# Altium PCB FLATSAT BCR.PcbDoc (part 3 of 3)
Units mm, origin at the board's own origin, x right, y up, seen from the top; angles counter-clockwise.
Board outline 180 x 90 mm, 4 copper layers (Top Layer, Internal Plane 1, Internal Plane 2, Bottom Layer); 220 components, 140 nets, 843 pads, 517 vias.
Unrouted connection lines stored in the file: 2.
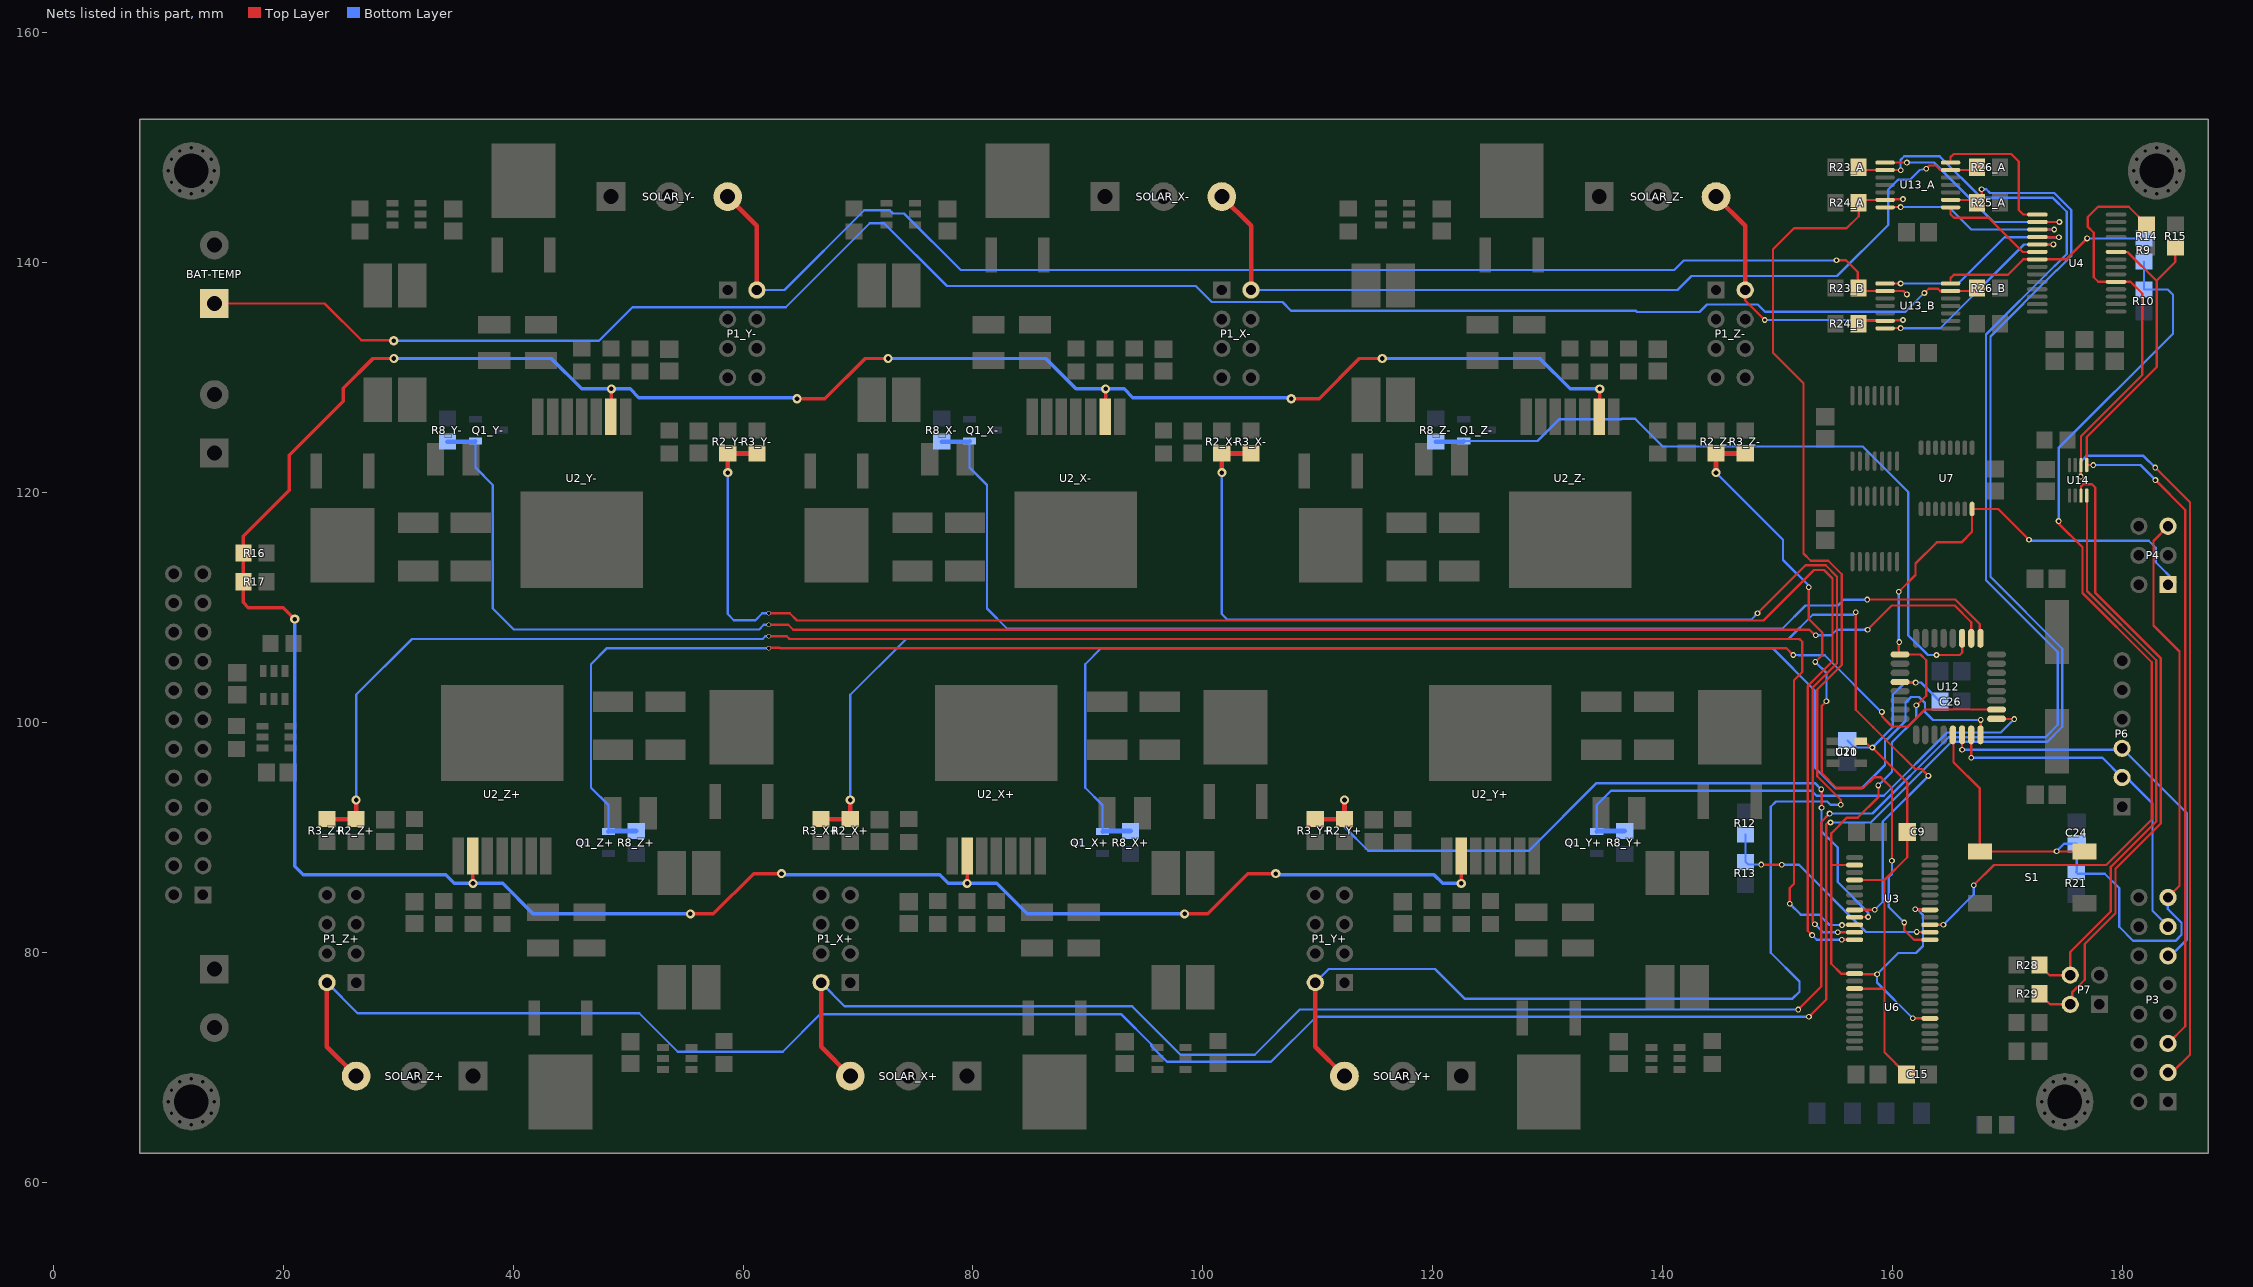
[diagram p5: the nets of this part, all layers, seen from the top]

## Via types
v1: diameter 0.5, hole 0.3, Top Layer to Bottom Layer, tented both sides, 205 vias
v2: diameter 0.5, hole 0.3, Top Layer to Bottom Layer, tented bottom, 114 vias
v3: diameter 0.8, hole 0.4, Top Layer to Bottom Layer, tented both sides, 103 vias
v4: diameter 1, hole 0.5, Top Layer to Bottom Layer, tented both sides, 77 vias
v5: diameter 0.4, hole 0.3, Top Layer to Bottom Layer, tented both sides, 18 vias

## Nets (pads, with @x,y where several pads share a name; then routed paths per layer and width w, separated by ;. In a path a pad name is that pad's centre, name@x,y a point inside that pad or via, vN(x,y) a via of type N, cw(c..) or ccw(c..) an arc to the next point about the centre after c; other vN are vias at no path point) (continued)
R\E\S\E\T\: C24.2 P3.15 P4.5 R21.2 S1.2 U12.29 | length 76.8
  Top Layer w0.2: U12.29@165.275,98.925 165.325,98.875 165.325,96.55 167.625,94.25 S1.2@167.625,88.775 S1.2@176.725,88.775 ; P4.5@184,117.08 182.725,115.805 182.725,108.453 185,106.178 185,85.8 184.125,84.925 P3.15@184.125,84.68 ; P4.5@184.122,116.777 P4.5@184.398,116.777
  Bottom Layer w0.2: v1(174.3,88.8) 174.95,89.45 C24.2@176.05,89.45 176.05,87.05 R21.2@176,87 176.15,86.85 178.5,86.85 179.75,85.6 179.75,82.225 180.975,81 184.65,81 185.175,81.525 185.175,82.575 183.975,83.775 183.975,84.53 P3.15@184.125,84.68
RXD: P3.11 P6.3 U12.30 | length 36.8
  Top Layer w0.2: v1(166.075,97.625) U12.30@166.075,99.35
  Bottom Layer w0.2: v1(166.075,97.625) 179.87,97.625 P6.3@180,97.755 185.65,92.105 185.65,81.125 P3.11@184.125,79.6
SCK: P4.1 U3.5 U3.14 U6.5 U6.14 U7.8 U12.17 | length 93.2
  Top Layer w0.2: 154.7,87.6 U3.14@156.725,87.6 ; U6.14@156.725,78.1 v1(158.675,78.1) ; U6.14@156.725,78.15 155.55,78.15 154.7,79 154.7,90.353 156.072,91.725 157,91.725 158.8,93.525 v1@158.8,94.55 ; v1@160.575,107.1 160.575,106.025 U12.17@160.675,105.925 162.45,105.925 162.95,105.425 162.95,102.325 162.125,101.5 v1(162.1,101.5) ; v1(160.575,111.375) 162.025,112.825 162.025,113.825 163.875,115.675 166.025,115.675 166.947,116.597 U7.8@166.947,118.583 169.217,118.583 v1(171.9,115.9) ; v1(161.775,74.275) U6.5@163,74.275 ; v1(162,83.75) U3.5@163.225,83.75
  Bottom Layer w0.2: v1(158.775,94.525) 159.975,95.725 159.975,98.275 162.1,100.4 v1(162.1,101.5) ; v1(160.575,111.375) 160.575,107.025 v1(160.6,107) ; v1(161.775,74.275) 158.675,77.375 v1(158.675,78.1) 160.525,79.95 162.075,79.95 162.675,80.55 162.675,83.253 162.178,83.75 v1(162,83.75) ; v1(171.9,115.9) 171.985,115.815 182.31,115.815 182.925,115.2 182.925,113.95 P4.1@184.65,112.225
SHDNX+: Q1_X+.1 R8_X+.1 U12.32 | length 113.6
  Top Layer w0.2: U12.32@167.7,98.5 v1(167.7,100.225)
  Bottom Layer w0.2: Q1_X+.1@91.287,90.509 91.287,92.813 89.775,94.325 89.775,105.075 91.175,106.475 149.575,106.475 153.3,102.75 153.3,96.05 155.1,94.25 157.325,94.25 159.375,96.3 159.375,98.359 161.15,100.134 161.15,101.75 161.625,102.225 162.325,102.225 162.85,101.7 162.85,100.925 163.55,100.225 v1(167.7,100.225)
  Bottom Layer w0.4: Q1_X+.1@91.287,90.509 91.337,90.559 R8_X+.1@93.718,90.559
SHDNX-: Q1_X-.1 R8_X-.1 U12.9 | length 108
  Top Layer w0.2: v1(157.825,110.7) 165.475,110.7 167.625,108.55 167.625,107.375 U12.9@167.675,107.325
  Bottom Layer w0.2: Q1_X-.1@79.713,124.491 79.713,122.187 81.225,120.675 81.225,109.925 83,108.15 150.425,108.15 152.45,110.175 155.275,110.175 155.783,110.683 157.808,110.683 v1(157.825,110.7)
  Bottom Layer w0.4: R8_X-.1@77.282,124.441 79.663,124.441 Q1_X-.1@79.713,124.491
SHDNY+: Q1_Y+.1 R8_Y+.1 U12.1 | length 45.9
  Top Layer w0.2: U12.1@169.275,100.3 v1(170.625,100.3)
  Bottom Layer w0.2: Q1_Y+.1@134.287,90.509 134.287,92.813 135.549,94.075 152.95,94.075 153.4,93.625 159.259,93.625 164.759,99.125 169.45,99.125 v1(170.625,100.3)
  Bottom Layer w0.4: Q1_Y+.1@134.287,90.509 134.337,90.559 R8_Y+.1@136.718,90.559
SHDNY-: Q1_Y-.1 R8_Y-.1 U12.10 | length 150.6
  Top Layer w0.2: v5(62.25,108.5) 63.944,108.5 64.369,108.075 152.8,108.075 v1@153.3,107.575 ; v1(157.85,108.075) 159.95,110.175 165.434,110.175 166.875,108.734 U12.10@166.875,107.325
  Bottom Layer w0.2: Q1_Y-.1@36.713,124.491 36.713,122.187 38.225,120.675 38.225,109.925 40.05,108.1 61.406,108.1 61.806,108.5 v5(62.25,108.5) ; v1(153.35,107.6) 154.7,107.6 155.175,108.075 v1(157.85,108.075)
  Bottom Layer w0.4: R8_Y-.1@34.282,124.441 36.663,124.441 Q1_Y-.1@36.713,124.491
SHDNZ+: Q1_Z+.1 R8_Z+.1 U12.2 | length 144.2
  Top Layer w0.2: v5(62.225,106.475) 62.25,106.5 63.207,106.5 63.232,106.475 66.5,106.475 150.775,106.475 v1(151.375,105.875) ; v1(159.1,100.925) 159.1,100.541 159.55,100.091 159.55,100.087 159.887,99.75 159.891,99.75 159.991,99.65 161.375,99.65 162.85,101.125 U12.2@169.075,101.125
  Bottom Layer w0.2: Q1_Z+.1@48.287,90.509 48.287,92.813 46.775,94.325 46.775,105.075 48.175,106.475 v5(62.225,106.475) ; v1(151.375,105.875) 151.825,105.875 151.85,105.85 154.125,105.85 v1@159.075,100.9
  Bottom Layer w0.4: Q1_Z+.1@48.287,90.509 48.337,90.559 R8_Z+.1@50.718,90.559
SHDNZ-: Q1_Z-.1 R8_Z-.1 U12.11 | length 63.9
  Top Layer w0.2: v1(163.85,105.875) 165.875,105.875 166.1,106.1 U12.11@166.1,107.45
  Bottom Layer w0.2: Q1_Z-.1@122.713,124.491 129.141,124.491 131.05,126.4 136.425,126.4 136.45,126.425 137.625,126.425 140.025,124.025 157.425,124.025 161.4,120.05 161.4,107.575 163.1,105.875 v1(163.85,105.875)
  Bottom Layer w0.4: R8_Z-.1@120.282,124.441 122.663,124.441 Q1_Z-.1@122.713,124.491
THERMO_BAT: BAT-TEMP.1 R26_B.2 U13_B.13 | length 163.7
  Top Layer w0.2: BAT-TEMP.1@14,136.46 23.59,136.46 26.775,133.275 29.55,133.275 v3(29.6,133.225) ; v1(162.8,137.375) 163.175,137.75 163.978,137.75 164.189,137.539 165.064,137.539 U13_B.13@165.075,137.55 R26_B.2@167.125,137.55
  Top Layer w0.5: R26_B.2@167.125,137.55 R26_B.2@167.375,137.8
  Bottom Layer w0.2: v3(29.6,133.225) 47.475,133.225 50.393,136.143 63.718,136.143 71.025,143.45 72.275,143.45 77.75,137.975 99.4,137.975 100.792,136.583 106.942,136.583 107.708,135.817 137.708,135.817 137.8,135.725 143.225,135.725 143.875,136.375 148.3,136.375 148.925,135.75 161.15,135.75 v1@162.788,137.388
THERMO_X+: P1_X+.2 R23_A.2 SOLAR_X+.3 U13_A.2 | length 210.9
  Top Layer w0.2: v1(151.825,75.025) 153.825,77.025 153.825,91.35 v1(154.55,92.075) ; R23_A.2@157.325,148.075 U13_A.2@159.375,148.075 ; U13_A.2@159.6,148.075 v1@160.75,148.075
  Top Layer w0.4: P1_X+.2@66.794,77.367 66.794,71.779 SOLAR_X+.3@69.334,69.239
  Top Layer w0.5: R23_A.2@157.075,148.325 R23_A.2@157.325,148.075
  Bottom Layer w0.2: P1_X+.2@66.794,77.367 68.861,75.3 93.875,75.3 98.075,71.1 104.525,71.1 108.45,75.025 v1(151.825,75.025) ; v1(154.55,92.075) 158.275,92.075 164.925,98.725 173.325,98.725 174.4,99.8 174.4,106.125 168.15,112.375 168.15,133.766 174.134,139.75 174.159,139.75 175.175,140.766 175.175,144.434 173.934,145.675 167.722,145.675 164.122,149.275 161.047,149.275 160.725,148.953 160.725,148.075 v1(160.75,148.05)
THERMO_X-: P1_X-.2 R26_A.2 SOLAR_X-.3 U13_A.13 | length 78.9
  Top Layer w0.2: v1(162.95,148.175) 163.25,148.475 163.778,148.475 164.178,148.075 U13_A.13@165.075,148.075 R26_A.2@167.125,148.075
  Top Layer w0.4: SOLAR_X-.3@101.666,145.761 104.206,143.221 P1_X-.2@104.206,137.633
  Top Layer w0.5: R26_A.2@167.125,148.075 R26_A.2@167.375,148.325
  Bottom Layer w0.2: P1_X-.2@104.206,137.633 141.308,137.633 142.525,138.85 155.2,138.85 159.65,143.3 159.65,146.375 160.5,147.225 161.55,147.225 162.4,148.075 v1(162.95,148.175)
THERMO_Y+: P1_Y+.2 R24_A.2 SOLAR_Y+.3 U13_A.6 | length 144
  Top Layer w0.2: v1(155.525,92.85) 155.525,93.275 153.475,95.325 153.475,102.875 155.6,105 155.6,112.9 154.425,114.075 152.9,114.075 152.275,114.7 152.275,129.525 149.625,132.175 149.625,141.175 151.45,143 156.025,143 157.075,144.05 R24_A.2@157.075,145.225 ; R24_A.2@157.325,145.475 U13_A.6@159.375,145.475 ; U13_A.6@159.5,145.525 160.85,145.525 160.875,145.55 161.049,145.55 v1(160.935,145.55)
  Top Layer w0.4: P1_Y+.2@109.794,77.367 109.794,71.779 SOLAR_Y+.3@112.334,69.239
  Top Layer w0.5: R24_A.2@157.075,145.225 R24_A.2@157.325,145.475
  Bottom Layer w0.2: P1_Y+.2@109.794,77.367 110.975,78.548 120.202,78.548 122.775,75.975 151.325,75.975 151.925,76.575 151.925,77.475 149.425,79.975 149.425,92.675 149.875,93.125 154.35,93.125 154.625,92.85 v1(155.525,92.85)
THERMO_Y-: P1_Y-.2 R23_B.2 SOLAR_Y-.3 U13_B.2 | length 116.4
  Top Layer w0.2: v1(155.15,140.225) 155.975,140.225 157,139.2 157,137.875 R23_B.2@157.075,137.8 ; R23_B.2@157.325,137.55 U13_B.2@159.375,137.55 ; U13_B.2@159.6,137.55 160.975,137.55 v1(161.275,137.25)
  Top Layer w0.4: SOLAR_Y-.3@58.666,145.761 61.206,143.221 P1_Y-.2@61.206,137.633
  Top Layer w0.5: R23_B.2@157.075,137.8 R23_B.2@157.325,137.55
  Bottom Layer w0.2: P1_Y-.2@61.206,137.633 63.608,137.633 70.55,144.575 72.775,144.575 73.05,144.3 74.016,144.3 78.941,139.375 141.025,139.375 141.85,140.2 v1@155.15,140.2
THERMO_Z+: P1_Z+.2 R25_A.2 SOLAR_Z+.3 U13_A.9 | length 249.6
  Top Layer w0.2: v1(152.75,74.4) 154.25,75.9 154.25,91.15 154.4,91.3 v1(154.625,91.3) ; U13_A.9@165.075,145.475 R25_A.2@167.125,145.475 ; R25_A.2@167.775,145.05 v1(167.775,146.4)
  Top Layer w0.4: P1_Z+.2@23.794,77.367 23.794,71.779 SOLAR_Z+.3@26.334,69.239
  Top Layer w0.5: R25_A.2@167.125,145.475 R25_A.2@167.375,145.225
  Bottom Layer w0.2: P1_Z+.2@23.794,77.367 26.461,74.7 50.975,74.7 54.325,71.35 63.45,71.35 66.725,74.625 92.894,74.625 95.516,72.003 95.516,71.859 96.9,70.475 105.95,70.475 109.875,74.4 v1(152.75,74.4) ; v1(154.625,91.3) 158.125,91.3 165.15,98.325 173.5,98.325 174.8,99.625 174.8,106.425 168.55,112.675 168.55,133.6 174.3,139.35 174.325,139.35 175.575,140.6 175.575,144.6 174.1,146.075 168.5,146.075 168.175,146.4 v1(167.775,146.4)
THERMO_Z-: P1_Z-.2 R24_B.2 SOLAR_Z-.3 U13_B.6 | length 28.6
  Top Layer w0.2: P1_Z-.2@147.206,137.633 147.206,136.719 v1(148.9,135.025) ; R24_B.2@157.325,134.95 U13_B.6@159.375,134.95 ; U13_B.6@159.5,135 160.85,135 160.875,135.025 161.049,135.025 v1(160.935,135.025)
  Top Layer w0.4: SOLAR_Z-.3@144.666,145.761 147.206,143.221 P1_Z-.2@147.206,137.633
  Top Layer w0.5: R24_B.2@157.075,134.7 R24_B.2@157.325,134.95
  Bottom Layer w0.2: v1(148.9,135.025) v1(160.935,135.025)
TLM_SCL: P7.2 R29.1 U14.3 | length 55.9
  Top Layer w0.2: R29.1@172.8,76.4 173.725,75.475 P7.2@175.485,75.475 175.485,75.96 175.675,76.15 175.675,76.55 176.75,77.625 176.75,80.734 179.425,83.409 179.425,87.275 183.375,91.225 183.375,105.575 177.675,111.275 177.675,120.425 177.375,120.725 176.625,120.725 176.425,120.525 U14.3@176.425,119.75
TLM_SCL_5V: P3.3 R14.2 U4.5 U14.6 | length 98.1
  Top Layer w0.2: v1(176.4,121.4) U14.6@176.4,122.5 ; U14.6@176.425,122.4 176.425,124.916 181.75,130.241 181.75,137.325 180.725,138.35 U4.5@179.475,138.35 177.922,138.35 177.525,138.747 177.525,142.625 177,143.15 177,143.975 177.9,144.875 180.575,144.875 R14.2@182.125,143.325 ; v1(182.883,122.183) 185.9,119.166 185.9,71.1 184.34,69.54 P3.3@184,69.54
  Bottom Layer w0.2: v1(176.4,121.4) 176.4,122.7 176.9,123.2 181.866,123.2 v1(182.883,122.183) ; P3.3@183.86,69.54 P3.3@184,69.54
TLM_SDA: P7.4 R28.1 U14.4 | length 50.4
  Top Layer w0.2: R28.1@172.8,78.9 173.685,78.015 P7.4@175.485,78.015 175.485,80.035 179.025,83.575 179.025,87.441 182.975,91.391 182.975,105.409 176.95,111.434 U14.4@176.95,119.75
TLM_SDA_5V: P3.5 R15.2 U4.9 U14.5 | length 83.9
  Top Layer w0.2: U14.5@176.925,122.4 176.925,124.85 183.025,130.95 183.025,138.475 184.625,140.075 R15.2@184.625,141.325 ; U14.5@177,122.4 v1(177.5,122.4) ; U4.9@179.475,140.95 180.475,140.95 183.025,138.4 ; v1(182.9,121.1) 185.5,118.5 185.5,73.58 P3.5@184,72.08
  Bottom Layer w0.2: v1(177.5,122.4) 181.6,122.4 v1(182.9,121.1)
TSENSE_BAT_BCR: R9.1 R10.1 U3.3 | length 81.9
  Top Layer w0.2: U3.3@163.225,82.4 v1(164.45,82.4) ; v1(167.1,85.85) 168.856,87.606 178.625,87.606 182.575,91.556 182.575,105.244 176.55,111.269 176.55,115.25 174.475,117.325 v1(174.475,117.525)
  Bottom Layer w0.2: v1(164.45,82.4) 167.1,85.05 v1(167.1,85.85) ; v1(174.475,117.525) 174.475,123.875 184.425,133.825 184.425,137.225 183.975,137.675 R10.1@181.9,137.675 R9.1@181.9,140.1
TSENSE_BAT_TLM: R9.2 U4.21 U13_B.14 | length 18.8
  Top Layer w0.2: U13_B.14@165.075,138.2 165.075,138.675 165.35,138.95 170.05,138.95 171.4,140.3 U4.21@172.625,140.3 175.125,140.3 v1(176.95,142.125)
  Bottom Layer w0.2: v1@176.925,142.15 v1(176.95,142.125) 181.875,142.125 R9.2@181.9,142.1
TSENSE_X+: U4.16 U13_A.1 | length 18.7
  Top Layer w0.2: U13_A.1@159.375,148.725 v1(161.275,148.725) ; U4.16@173.2,143.55 v1(174.55,143.55)
  Bottom Layer w0.2: v1(161.275,148.725) 163.625,148.725 168.8,143.55 v1(174.55,143.55)
TSENSE_X-: U4.15 U13_A.14 | length 12.8
  Top Layer w0.2: U13_A.14@165.075,148.725 165.075,149.2 165.35,149.475 170.35,149.475 171,148.825 171,144.6 171.4,144.2 U4.15@172.625,144.2
TSENSE_Y+: U4.17 U13_A.7 | length 16.9
  Top Layer w0.2: U13_A.7@159.375,144.85 v1(160.725,144.85) ; U4.17@172.75,142.9 v1(174.1,142.9)
  Bottom Layer w0.2: v1(160.725,144.85) 164.925,144.85 166.875,142.9 v1(174.1,142.9)
TSENSE_Y-: U4.18 U13_B.1 | length 18.1
  Top Layer w0.2: U13_B.1@159.375,138.2 v1(160.725,138.2) ; U4.18@173.15,142.225 v1(174.5,142.225)
  Bottom Layer w0.2: v1(160.725,138.2) 165.75,138.2 169.775,142.225 v1(174.5,142.225)
TSENSE_Z+: U4.20 U13_A.8 | length 9.5
  Top Layer w0.2: U13_A.8@165.075,144.825 165.075,144.225 165.375,143.925 168.375,143.925 171.35,140.95 U4.20@172.625,140.95
TSENSE_Z-: U4.19 U13_B.7 | length 19
  Top Layer w0.2: U13_B.7@159.375,134.325 v1(160.725,134.325) ; U4.19@172.675,141.6 v1(174.025,141.6)
  Bottom Layer w0.2: v1(160.725,134.325) 160.75,134.3 164.175,134.3 171.475,141.6 v1(174.025,141.6)
TXD: P3.13 P6.2 U12.31 | length 31.1
  Top Layer w0.2: v1(166.875,96.925) U12.31@166.875,99.2
  Bottom Layer w0.2: v1(166.875,96.925) 178.29,96.925 P6.2@180,95.215 180.385,95.215 182.65,92.95 182.65,83.615 P3.13@184.125,82.14
V_FB: R16.1 R17.2 U2_X+.2 U2_X-.2 U2_Y+.2 U2_Y-.2 U2_Z+.2 U2_Z-.2 | length 288.4
  Top Layer w0.2: U2_Z+.2@36.494,88.389 U2_Z+.2@36.5,88.383 ; U2_X+.2@79.494,88.389 U2_X+.2@79.5,88.383 ; U2_Y+.2@122.494,88.389 U2_Y+.2@122.5,88.383
  Top Layer w0.3: v3(21,109) 20,110 16.95,110 16.5,110.45 16.5,116.2 20.5,120.2 20.5,123.25 25.2,127.95 25.2,129.075 27.8,131.675 v3(29.625,131.675) ; v3(36.5,86) U2_Z+.2@36.5,88.383 ; U2_Y-.2@48.55,126.642 v3(48.55,129.025) ; v3(55.425,83.35) 57.425,83.35 60.925,86.85 v3(63.35,86.85) ; v3(64.7,128.175) 67.125,128.175 70.625,131.675 v3(72.625,131.675) ; v3(79.5,86) U2_X+.2@79.5,88.383 ; U2_X-.2@91.55,126.642 v3(91.55,129.025) ; v3(98.425,83.35) 100.425,83.35 103.925,86.85 v3(106.35,86.85) ; v3(107.7,128.175) 110.125,128.175 113.625,131.675 v3(115.625,131.675) ; v3(122.5,86) U2_Y+.2@122.5,88.383 ; U2_Z-.2@134.55,126.642 v3(134.55,129.025)
  Bottom Layer w0.3: v3(21,109) 21,87.5 21.75,86.75 34.125,86.75 34.875,86 v3(36.5,86) 39.075,86 41.725,83.35 v3(55.425,83.35) ; v3(29.625,131.675) 43.325,131.675 45.975,129.025 v3(48.55,129.025) 50.175,129.025 50.925,128.275 64.6,128.275 v3(64.7,128.175) ; v3(63.35,86.85) 63.45,86.75 77.125,86.75 77.875,86 v3(79.5,86) 82.075,86 84.725,83.35 v3(98.425,83.35) ; v3(72.625,131.675) 86.325,131.675 88.975,129.025 v3(91.55,129.025) 93.175,129.025 93.925,128.275 107.6,128.275 v3(107.7,128.175) ; v3(106.35,86.85) 106.45,86.75 120.125,86.75 120.875,86 v3(122.5,86) ; v3(115.625,131.675) 129.325,131.675 131.975,129.025 v3(134.55,129.025)
VREF: C9.2 C15.2 C21.2 C26.1 U3.16 U6.16 U10.5 U12.20 | length 52.5
  Top Layer w0.2: U6.16@156.725,76.85 156.75,76.825 159.325,76.825 ; U3.16@156.725,86.3 159.325,86.3 ; U10.5@157.25,98.375 157.575,98.375 158.125,97.825 158.25,97.825 161.3,94.775 C9.2@161.3,90.475 161.3,88.275 159.325,86.3 ; U12.20@160.3,103.475 v1(162.025,103.475) ; C15.2@161.25,69.375 159.325,71.3 159.325,86.3
  Bottom Layer w0.2: C21.2@156.1,98.425 156.7,97.825 v1(158.275,97.825) 160.05,99.6 160.05,102.425 161.1,103.475 v1(162.025,103.475) 162.5,103.475 C26.1@164.15,101.825
VSENSE_BAT: R12.2 R13.1 U3.2 | length 21.2
  Top Layer w0.2: v1(148.6,87.638) 148.612,87.625 v1(150.375,87.625) ; v1(162.125,81.775) U3.2@163.475,81.775
  Bottom Layer w0.2: R12.2@147.225,90.25 R13.1@147.225,87.875 147.463,87.638 v1(148.6,87.638) ; v1(150.375,87.625) 151.875,87.625 157.725,81.775 v1(162.125,81.775)
VSENSE_X+: R2_X+.2 R3_X+.1 U3.20 | length 136
  Top Layer w0.2: v1(156.825,109.6) 156.825,101.118 158.35,99.593 158.35,99.59 159.39,98.55 159.393,98.55 161.993,95.95 162.55,95.95 v1(163.15,95.35) ; U3.20@157.125,83.7 v1(158.475,83.7)
  Top Layer w0.4: R3_X+.1@66.794,91.591 R2_X+.2@69.334,91.591 v3(69.334,93.258)
  Bottom Layer w0.2: v3(69.334,93.258) 69.334,102.409 74.2,107.275 150.982,107.275 153.082,109.375 156.6,109.375 v1(156.825,109.6) ; v1(158.475,83.7) 159.175,84.4 159.175,91.378 v1@163.147,95.35
VSENSE_X-: R2_X-.2 R3_X-.1 U3.23 | length 107.3
  Top Layer w0.2: v1(148.275,109.5) 152.45,113.675 154.216,113.675 155.2,112.691 155.2,105.166 153.075,103.041 153.075,82.65 v1(153.275,82.45) ; v1(155.25,81.75) U3.23@156.475,81.75
  Top Layer w0.4: v3(101.666,121.742) R2_X-.2@101.666,123.409 R3_X-.1@104.206,123.409
  Bottom Layer w0.2: v3(101.666,121.742) 101.666,109.434 102.15,108.95 147.725,108.95 v1(148.275,109.5) ; v1(153.275,82.45) 153.975,81.75 v1(155.25,81.75)
VSENSE_Y+: R2_Y+.2 R3_Y+.1 U3.21 | length 65.7
  Top Layer w0.2: v1(153.825,94.175) 153.875,94.125 v1@153.875,92.575 ; U3.21@156.55,83.075 v1(157.9,83.075)
  Top Layer w0.4: R3_Y+.1@109.794,91.591 R2_Y+.2@112.334,91.591 v3(112.334,93.258)
  Bottom Layer w0.2: v3(112.334,93.258) 112.334,90.916 114.4,88.85 128.4,88.85 134.275,94.725 153.275,94.725 v1(153.825,94.175) ; v1(153.85,92.575) 153.85,90.525 155.25,89.125 155.25,86.125 157.9,83.475 v1(157.9,83.075)
VSENSE_Y-: R2_Y-.2 R3_Y-.1 U3.24 | length 151.5
  Top Layer w0.2: v5(62.25,109.5) 64.075,109.5 64.7,108.875 148.8,108.875 153.2,113.275 154.05,113.275 154.8,112.525 154.8,105.331 152.65,103.181 152.65,81.875 v1(153.025,81.5) ; v1(155.6,81.1) U3.24@156.825,81.1
  Top Layer w0.4: v3(58.666,121.742) R2_Y-.2@58.666,123.409 R3_Y-.1@61.206,123.409
  Bottom Layer w0.2: v3(58.666,121.742) 58.666,109.434 59.2,108.9 61.075,108.9 61.675,109.5 v5(62.25,109.5) ; v1(153.025,81.5) 153.425,81.1 v1(155.6,81.1)
VSENSE_Z+: R2_Z+.2 R3_Z+.1 U3.22 | length 171.2
  Top Layer w0.2: v5(62.25,107.5) 63.812,107.5 64.037,107.275 151.932,107.275 152.175,107.032 152.175,104.403 151.45,103.678 151.45,85.975 151.075,85.6 v1(151.075,84.225) ; v1(155.625,82.375) U3.22@156.85,82.375
  Top Layer w0.4: R3_Z+.1@23.794,91.591 R2_Z+.2@26.334,91.591 v3(26.334,93.258)
  Bottom Layer w0.2: v3(26.334,93.258) 26.334,102.409 31.2,107.275 61.713,107.275 61.938,107.5 v5(62.25,107.5) ; v1@151.15,84.175 152.05,83.275 153.65,83.275 154.55,82.375 v1(155.625,82.375)
VSENSE_Z-: R2_Z-.2 R3_Z-.1 U3.1 | length 58
  Top Layer w0.2: v1(152.725,111.775) 152.725,109.003 153.9,107.828 153.9,105.875 v1(153.3,105.275) ; v1(154.275,101.85) 153.875,101.45 153.875,95.575 155.125,94.325 157.5,94.325 158.4,95.225 159.025,95.225 159.975,94.275 v1(159.975,87.975) ; v1(161.05,82.6) 161.05,81.95 161.9,81.1 U3.1@163.275,81.1
  Top Layer w0.4: v3(144.666,121.742) R2_Z-.2@144.666,123.409 R3_Z-.1@147.206,123.409
  Bottom Layer w0.2: v3(144.666,121.742) 150.5,115.908 150.5,114.15 152.725,111.925 v1(152.725,111.775) ; v1(153.3,105.275) 154.275,104.3 v1(154.275,101.85) ; v1(159.975,87.975) 159.975,86.803 159.7,86.528 159.7,83.95 v1(161.05,82.6)
pads on no net: Designator5.1 Designator6.1 Designator7.1 Designator8.1 U3.12 U3.13 U3.17 U3.18 U4.4 U4.7 U4.8 U4.11 U4.22 U4.23 U4.24 U4.25 U4.28 U5.12 U5.13 U5.14 U6.12 U6.13 U6.17 U6.18 U7.5 U7.12 U9.1 U9.2 U9.3 U10.1 U12.19 U12.22 U12.23 U12.24 U12.25 U12.26

## Polygon pours and split planes (outlines as drawn)
NetC6_X+_1 on Top Layer "Top Layer-No Net" (solid, remove dead copper, pour order 31): 124.854,110.185 124.346,109.677 108.09,109.677 107.582,110.185 107.582,119.329 108.09,119.837 114.694,119.837 115.202,119.329 115.202,115.773 115.71,115.265 124.346,115.265 124.854,114.757
GND on Top Layer "Top Layer-No Net" (solid, remove dead copper, pour order 37): 125.362,110.185 125.87,109.677 147.698,109.677 147.714,109.693 148.206,110.185 148.222,110.185 148.222,120.345 147.714,120.853 138.57,120.853 137.538,121.885 125.87,121.885 125.362,121.377 125.362,110.185
GND on Top Layer "Top Layer-No Net" (solid, remove dead copper, pour order 38): 131.638,104.815 131.13,105.323 109.302,105.323 109.286,105.307 108.794,104.815 108.778,104.815 108.778,94.655 109.286,94.147 118.43,94.147 119.462,93.115 131.13,93.115 131.638,93.623 131.638,104.815
NetC6_X+_1 on Top Layer "Top Layer-No Net" (solid, remove dead copper, pour order 32): 132.146,104.815 132.654,105.323 148.91,105.323 149.418,104.815 149.418,95.671 148.91,95.163 142.306,95.163 141.798,95.671 141.798,99.227 141.29,99.735 132.654,99.735 132.146,100.243
GND on Top Layer "Top Layer-No Net" (solid, remove dead copper, pour order 39): 82.362,110.185 82.87,109.677 104.698,109.677 104.714,109.693 105.206,110.185 105.222,110.185 105.222,120.345 104.714,120.853 95.57,120.853 94.538,121.885 82.87,121.885 82.362,121.377 82.362,110.185
NetC6_X+_1 on Top Layer "Top Layer-No Net" (solid, remove dead copper, pour order 33): 81.854,110.185 81.346,109.677 65.09,109.677 64.582,110.185 64.582,119.329 65.09,119.837 71.694,119.837 72.202,119.329 72.202,115.773 72.71,115.265 81.346,115.265 81.854,114.757
NetC6_X+_1 on Top Layer "Top Layer-No Net" (solid, remove dead copper, pour order 34): 89.146,104.815 89.654,105.323 105.91,105.323 106.418,104.815 106.418,95.671 105.91,95.163 99.306,95.163 98.798,95.671 98.798,99.227 98.29,99.735 89.654,99.735 89.146,100.243
GND on Top Layer "Top Layer-No Net" (solid, remove dead copper, pour order 40): 88.638,104.815 88.13,105.323 66.302,105.323 66.286,105.307 65.794,104.815 65.778,104.815 65.778,94.655 66.286,94.147 75.43,94.147 76.462,93.115 88.13,93.115 88.638,93.623 88.638,104.815
NetC6_X+_1 on Top Layer "Top Layer-No Net" (solid, remove dead copper, pour order 35): 38.854,110.185 38.346,109.677 22.09,109.677 21.582,110.185 21.582,119.329 22.09,119.837 28.694,119.837 29.202,119.329 29.202,115.773 29.71,115.265 38.346,115.265 38.854,114.757
GND on Top Layer "Top Layer-No Net" (solid, remove dead copper, pour order 41): 39.362,110.185 39.87,109.677 61.698,109.677 61.714,109.693 62.206,110.185 62.222,110.185 62.222,120.345 61.714,120.853 52.57,120.853 51.538,121.885 39.87,121.885 39.362,121.377 39.362,110.185
GND on Top Layer "Top Layer-No Net" (solid, remove dead copper, pour order 42): 45.638,104.815 45.13,105.323 23.302,105.323 23.286,105.307 22.794,104.815 22.778,104.815 22.778,94.655 23.286,94.147 32.43,94.147 33.462,93.115 45.13,93.115 45.638,93.623 45.638,104.815
NetC6_X+_1 on Top Layer "Top Layer-No Net" (solid, remove dead copper, pour order 36): 46.146,104.815 46.654,105.323 62.91,105.323 63.418,104.815 63.418,95.671 62.91,95.163 56.306,95.163 55.798,95.671 55.798,99.227 55.29,99.735 46.654,99.735 46.146,100.243
GND on Bottom Layer "Top Layer-No Net" (solid, remove dead copper, pour order 43): 125.362,110.201 125.87,109.693 138.062,109.693 138.57,110.201 138.57,121.377 138.062,121.885 125.87,121.885 125.362,121.377
NetC6_X+_1 on Bottom Layer "Top Layer-No Net" (solid, remove dead copper, pour order 49): 107.582,112.741 108.09,112.233 114.186,112.233 114.694,112.741 114.694,119.345 114.186,119.853 108.09,119.853 107.582,119.345
NetD1_Z-_2 on Bottom Layer "Top Layer-No Net" (solid, remove dead copper, pour order 55): 123.33,143.221 123.838,142.713 129.934,142.713 130.442,143.221 130.442,149.825 129.934,150.333 123.838,150.333 123.33,149.825
NetD1_Y+_2 on Bottom Layer "Top Layer-No Net" (solid, remove dead copper, pour order 56): 133.67,71.779 133.162,72.287 127.066,72.287 126.558,71.779 126.558,65.175 127.066,64.667 133.162,64.667 133.67,65.175
NetC6_X+_1 on Bottom Layer "Top Layer-No Net" (solid, remove dead copper, pour order 50): 149.418,102.259 148.91,102.767 142.814,102.767 142.306,102.259 142.306,95.655 142.814,95.147 148.91,95.147 149.418,95.655
GND on Bottom Layer "Top Layer-No Net" (solid, remove dead copper, pour order 44): 131.638,104.799 131.13,105.307 118.938,105.307 118.43,104.799 118.43,93.623 118.938,93.115 131.13,93.115 131.638,93.623
NetD1_X-_2 on Bottom Layer "Top Layer-No Net" (solid, remove dead copper, pour order 57): 80.33,143.221 80.838,142.713 86.934,142.713 87.442,143.221 87.442,149.825 86.934,150.333 80.838,150.333 80.33,149.825
NetC6_X+_1 on Bottom Layer "Top Layer-No Net" (solid, remove dead copper, pour order 51): 64.582,112.741 65.09,112.233 71.186,112.233 71.694,112.741 71.694,119.345 71.186,119.853 65.09,119.853 64.582,119.345
GND on Bottom Layer "Top Layer-No Net" (solid, remove dead copper, pour order 45): 82.362,110.201 82.87,109.693 95.062,109.693 95.57,110.201 95.57,121.377 95.062,121.885 82.87,121.885 82.362,121.377
GND on Bottom Layer "Top Layer-No Net" (solid, remove dead copper, pour order 46): 88.638,104.799 88.13,105.307 75.938,105.307 75.43,104.799 75.43,93.623 75.938,93.115 88.13,93.115 88.638,93.623
NetC6_X+_1 on Bottom Layer "Top Layer-No Net" (solid, remove dead copper, pour order 52): 106.418,102.259 105.91,102.767 99.814,102.767 99.306,102.259 99.306,95.655 99.814,95.147 105.91,95.147 106.418,95.655
NetD1_X+_2 on Bottom Layer "Top Layer-No Net" (solid, remove dead copper, pour order 58): 90.67,71.779 90.162,72.287 84.066,72.287 83.558,71.779 83.558,65.175 84.066,64.667 90.162,64.667 90.67,65.175
GND on Bottom Layer "Top Layer-No Net" (solid, remove dead copper, pour order 47): 39.362,110.201 39.87,109.693 52.062,109.693 52.57,110.201 52.57,121.377 52.062,121.885 39.87,121.885 39.362,121.377
NetC6_X+_1 on Bottom Layer "Top Layer-No Net" (solid, remove dead copper, pour order 53): 21.582,112.741 22.09,112.233 28.186,112.233 28.694,112.741 28.694,119.345 28.186,119.853 22.09,119.853 21.582,119.345
NetD1_Y-_2 on Bottom Layer "Top Layer-No Net" (solid, remove dead copper, pour order 59): 37.33,143.221 37.838,142.713 43.934,142.713 44.442,143.221 44.442,149.825 43.934,150.333 37.838,150.333 37.33,149.825
NetD1_Z+_2 on Bottom Layer "Top Layer-No Net" (solid, remove dead copper, pour order 60): 47.67,71.779 47.162,72.287 41.066,72.287 40.558,71.779 40.558,65.175 41.066,64.667 47.162,64.667 47.67,65.175
NetC6_X+_1 on Bottom Layer "Top Layer-No Net" (solid, remove dead copper, pour order 54): 63.418,102.259 62.91,102.767 56.814,102.767 56.306,102.259 56.306,95.655 56.814,95.147 62.91,95.147 63.418,95.655
GND on Bottom Layer "Top Layer-No Net" (solid, remove dead copper, pour order 48): 45.638,104.799 45.13,105.307 32.938,105.307 32.43,104.799 32.43,93.623 32.938,93.115 45.13,93.115 45.638,93.623
NetD1_Z-_1 on Internal Plane 1 (split plane): 149.871,127.5 149.871,125.129 107.629,125.129 107.629,151.99 149.871,151.99
5V0 on Internal Plane 1 (split plane): 186.99,130.129 153.879,130.129 153.879,151.99 186.99,151.99
NetD1_X-_1 on Internal Plane 1 (split plane): 107.371,125.129 65.129,125.129 65.129,151.99 107.371,151.99
3V3 on Internal Plane 1 (split plane): 153.621,130 153.63,129.95 153.658,129.908 153.7,129.88 153.75,129.871 186.99,129.871 186.99,63.01 150.129,63.01 150.129,90 150.129,127.5 150.129,151.99 153.621,151.99
NetD1_Y+_1 on Internal Plane 1 (split plane): 149.871,63.01 107.629,63.01 107.629,89.871 149.871,89.871
NetC6_X+_1 on Internal Plane 1 (split plane): 149.871,90.129 8.01,90.129 8.01,124.871 149.871,124.871
NetD1_Y-_1 on Internal Plane 1 (split plane): 64.871,125.129 8.01,125.129 8.01,151.99 64.871,151.99
NetD1_X+_1 on Internal Plane 1 (split plane): 107.371,63.01 62.629,63.01 62.629,89.871 107.371,89.871
NetD1_Z+_1 on Internal Plane 1 (split plane): 62.371,63.01 8.01,63.01 8.01,89.871 62.371,89.871
GND on Internal Plane 2 (split plane): 186.99,63.01 150.154,63.01 150.154,104 150.145,104.05 150.117,104.092 150.075,104.12 150.025,104.129 149.975,104.12 149.933,104.092 149.905,104.05 149.896,104 149.896,63.01 8.01,63.01 8.01,151.99 149.871,151.99 149.871,112 149.88,111.95 149.908,111.908 149.95,111.88 150,111.871 150.05,111.88 150.092,111.908 150.12,111.95 150.129,112 150.129,151.99 186.99,151.99

## Other copper
Internal Plane 1 (plane layer: these items are gaps in the copper):
  lines w0.254: 2.629,125 150,125 150,155 ; 7.5,90 150,90 ; 62.5,60 62.5,90 ; 65,125 65,155 ; 107.5,60 107.5,90 ; 107.5,125 107.5,155 ; 150,60 150,90 ; 150,127.5 150,90 ; 153.75,152.5 153.75,130 187.5,130
Internal Plane 2 (plane layer: these items are gaps in the copper):
  lines w0.254: 150,112 150,157.5 ; 150.025,56.125 150.025,104

## Silkscreen, mask and mechanical layers (free items; w line width, h text height)
Top Overlay:
  text "V+" at 49,152 h1 r180
  text "V+" at 49,152 h1 r180
  text "V+" at 49,152 h1 r180
  text "V+" at 49,152 h1 r180
  text "V+" at 49,152 h1 r180
  text "V+" at 49,152 h1 r180
  text "V+" at 49,152 h1 r180
  text "V+" at 49,152 h1 r180
  text "GND" at 55,152 h1 r180
  text "GND" at 55,152 h1 r180
  text "GND" at 55,152 h1 r180
  text "GND" at 55,152 h1 r180
  text "GND" at 55,152 h1 r180
  text "GND" at 55,152 h1 r180
  text "GND" at 55,152 h1 r180
  text "GND" at 55,152 h1 r180
  text "TEMP" at 61,152 h1 r180
  text "TEMP" at 61,152 h1 r180
  text "TEMP" at 61,152 h1 r180
  text "TEMP" at 61,152 h1 r180
  text "TEMP" at 61,152 h1 r180
  text "TEMP" at 61,152 h1 r180
  text "TEMP" at 61,152 h1 r180
  text "TEMP" at 61,152 h1 r180
  text "V+" at 92,152 h1 r180
  text "V+" at 92,152 h1 r180
  text "V+" at 92,152 h1 r180
  text "V+" at 92,152 h1 r180
  text "V+" at 92,152 h1 r180
  text "V+" at 92,152 h1 r180
  text "V+" at 92,152 h1 r180
  text "V+" at 92,152 h1 r180
  text "GND" at 98,152 h1 r180
  text "GND" at 98,152 h1 r180
  text "GND" at 98,152 h1 r180
  text "GND" at 98,152 h1 r180
  text "GND" at 98,152 h1 r180
  text "GND" at 98,152 h1 r180
  text "GND" at 98,152 h1 r180
  text "GND" at 98,152 h1 r180
  text "TEMP" at 104,152 h1 r180
  text "TEMP" at 104,152 h1 r180
  text "TEMP" at 104,152 h1 r180
  text "TEMP" at 104,152 h1 r180
  text "TEMP" at 104,152 h1 r180
  text "TEMP" at 104,152 h1 r180
  text "TEMP" at 104,152 h1 r180
  text "TEMP" at 104,152 h1 r180
  text "V+" at 135,152 h1 r180
  text "V+" at 135,152 h1 r180
  text "V+" at 135,152 h1 r180
  text "V+" at 135,152 h1 r180
  text "V+" at 135,152 h1 r180
  text "V+" at 135,152 h1 r180
  text "V+" at 135,152 h1 r180
  text "V+" at 135,152 h1 r180
  text "GND" at 141,152 h1 r180
  text "GND" at 141,152 h1 r180
  text "GND" at 141,152 h1 r180
  text "GND" at 141,152 h1 r180
  text "GND" at 141,152 h1 r180
  text "GND" at 141,152 h1 r180
  text "GND" at 141,152 h1 r180
  text "GND" at 141,152 h1 r180
  text "TEMP" at 147,152 h1 r180
  text "TEMP" at 147,152 h1 r180
  text "TEMP" at 147,152 h1 r180
  text "TEMP" at 147,152 h1 r180
  text "TEMP" at 147,152 h1 r180
  text "TEMP" at 147,152 h1 r180
  text "TEMP" at 147,152 h1 r180
  text "TEMP" at 147,152 h1 r180
  text "ICSP" at 186.7,112.8 h1 r90
  text "FTDI" at 182.9,107.025 h1
  text "RESET" at 170,90 h1
  text "GND" at 179.625,69.45 h1 r90
  text "5V0" at 179.7,65.375 h1 r90
  text "3V3" at 186.7,65.2 h1 r90
  text "3V3_ON" at 160.875,64.575 h1
  text "TEMP" at 24,63 h1
  text "TEMP" at 24,63 h1
  text "TEMP" at 24,63 h1
  text "TEMP" at 24,63 h1
  text "TEMP" at 24,63 h1
  text "TEMP" at 24,63 h1
  text "TEMP" at 24,63 h1
  text "TEMP" at 24,63 h1
  text "GND" at 30,63 h1
  text "GND" at 30,63 h1
  text "GND" at 30,63 h1
  text "GND" at 30,63 h1
  text "GND" at 30,63 h1
  text "GND" at 30,63 h1
  text "GND" at 30,63 h1
  text "GND" at 30,63 h1
  text "V+" at 36,63 h1
  text "V+" at 36,63 h1
  text "V+" at 36,63 h1
  text "V+" at 36,63 h1
  text "V+" at 36,63 h1
  text "V+" at 36,63 h1
  text "V+" at 36,63 h1
  text "V+" at 36,63 h1
  text "TEMP" at 67,63 h1
  text "TEMP" at 67,63 h1
  text "TEMP" at 67,63 h1
  text "TEMP" at 67,63 h1
  text "TEMP" at 67,63 h1
  text "TEMP" at 67,63 h1
  text "TEMP" at 67,63 h1
  text "TEMP" at 67,63 h1
  text "TEMP" at 67,63 h1
  text "TEMP" at 67,63 h1
  text "TEMP" at 67,63 h1
  text "TEMP" at 67,63 h1
  text "GND" at 73,63 h1
  text "GND" at 73,63 h1
  text "GND" at 73,63 h1
  text "GND" at 73,63 h1
  text "GND" at 73,63 h1
  text "GND" at 73,63 h1
  text "GND" at 73,63 h1
  text "GND" at 73,63 h1
  text "GND" at 73,63 h1
  text "GND" at 73,63 h1
  text "GND" at 73,63 h1
  text "GND" at 73,63 h1
  text "V+" at 79,63 h1
  text "V+" at 79,63 h1
  text "V+" at 79,63 h1
  text "V+" at 79,63 h1
  text "V+" at 79,63 h1
  text "V+" at 79,63 h1
  text "V+" at 79,63 h1
  text "V+" at 79,63 h1
  text "V+" at 79,63 h1
  text "V+" at 79,63 h1
  text "V+" at 79,63 h1
  text "V+" at 79,63 h1
  text "TEMP" at 110,63 h1
  text "TEMP" at 110,63 h1
  text "TEMP" at 110,63 h1
  text "TEMP" at 110,63 h1
  text "TEMP" at 110,63 h1
  text "TEMP" at 110,63 h1
  text "TEMP" at 110,63 h1
  text "TEMP" at 110,63 h1
  text "TEMP" at 110,63 h1
  text "TEMP" at 110,63 h1
  text "TEMP" at 110,63 h1
  text "TEMP" at 110,63 h1
  text "TEMP" at 110,63 h1
  text "TEMP" at 110,63 h1
  text "TEMP" at 110,63 h1
  text "TEMP" at 110,63 h1
  text "GND" at 116,63 h1
  text "GND" at 116,63 h1
  text "GND" at 116,63 h1
  text "GND" at 116,63 h1
  text "GND" at 116,63 h1
  text "GND" at 116,63 h1
  text "GND" at 116,63 h1
  text "GND" at 116,63 h1
  text "GND" at 116,63 h1
  text "GND" at 116,63 h1
  text "GND" at 116,63 h1
  text "GND" at 116,63 h1
  text "GND" at 116,63 h1
  text "GND" at 116,63 h1
  text "GND" at 116,63 h1
  text "GND" at 116,63 h1
  text "V+" at 122,63 h1
  text "V+" at 122,63 h1
  text "V+" at 122,63 h1
  text "V+" at 122,63 h1
  text "V+" at 122,63 h1
  text "V+" at 122,63 h1
  text "V+" at 122,63 h1
  text "V+" at 122,63 h1
  text "V+" at 122,63 h1
  text "V+" at 122,63 h1
  text "V+" at 122,63 h1
  text "V+" at 122,63 h1
  text "V+" at 122,63 h1
  text "V+" at 122,63 h1
  text "V+" at 122,63 h1
  text "V+" at 122,63 h1
Bottom Overlay:
  text "Designed by Thomas Fisk" at 72.5,110 h1.52 r180
  text "FLATSAT BCR Rev. 1.0" at 75,107.5 h1.52 r180
  text "BLUESAT" at 80,102.5 h2.5 r180
Mechanical 1:
  the board outline again, w0.254

## Text inside footprints (layer, text, board x,y; h text height)
P1_X+: Top Overlay "2" at 67.302,74.827 h1.27 r90; Top Overlay "1" at 69.842,75.335 h1.27 r90; Top Overlay "7" at 69.842,86.511 h1.27 r90; Top Overlay "8" at 67.302,86.511 h1.27 r90
P1_X-: Top Overlay "2" at 103.698,140.173 h1.27 r270; Top Overlay "1" at 101.158,139.665 h1.27 r270; Top Overlay "7" at 101.158,128.489 h1.27 r270; Top Overlay "8" at 103.698,128.489 h1.27 r270
P1_Y+: Top Overlay "2" at 110.302,74.827 h1.27 r90; Top Overlay "1" at 112.842,75.335 h1.27 r90; Top Overlay "7" at 112.842,86.511 h1.27 r90; Top Overlay "8" at 110.302,86.511 h1.27 r90
P1_Y-: Top Overlay "2" at 60.698,140.173 h1.27 r270; Top Overlay "1" at 58.158,139.665 h1.27 r270; Top Overlay "7" at 58.158,128.489 h1.27 r270; Top Overlay "8" at 60.698,128.489 h1.27 r270
P1_Z+: Top Overlay "2" at 24.302,74.827 h1.27 r90; Top Overlay "1" at 26.842,75.335 h1.27 r90; Top Overlay "7" at 26.842,86.511 h1.27 r90; Top Overlay "8" at 24.302,86.511 h1.27 r90
P1_Z-: Top Overlay "2" at 146.698,140.173 h1.27 r270; Top Overlay "1" at 144.158,139.665 h1.27 r270; Top Overlay "7" at 144.158,128.489 h1.27 r270; Top Overlay "8" at 146.698,128.489 h1.27 r270
P2: Top Overlay "1" at 13.508,82.46 h1.27 r90; Top Overlay "2" at 10.968,82.46 h1.27 r90; Top Overlay "23" at 13.508,114.464 h1.27 r90; Top Overlay "24" at 10.968,114.464 h1.27 r90
P3: Top Overlay "2" at 181.968,64.46 h1.27 r90; Top Overlay "1" at 184.508,64.46 h1.27 r90; Top Overlay "15" at 184.508,86.304 h1.27 r90; Top Overlay "16" at 181.968,86.304 h1.27 r90
P4: Top Overlay "6" at 181.968,118.604 h1.27 r90; Top Overlay "5" at 184.508,118.604 h1.27 r90; Top Overlay "2" at 181.968,109.46 h1.27 r90; Top Overlay "1" at 184.508,109.968 h1.27 r90
P7: Top Overlay "1" at 178.533,73.443 h1.27 r90; Top Overlay "2" at 175.993,72.935 h1.27 r90; Top Overlay "4" at 175.993,79.539 h1.27 r90; Top Overlay "3" at 178.533,79.539 h1.27 r90